# Altium PCB MAIN.PcbDoc (part 1 of 2)
Units mil, origin at the board's own origin, x right, y up, seen from the top; angles counter-clockwise.
Board outline 1220.47 x 826.77 mil, 6 copper layers (Top Layer, Layer 1, Layer 2, Layer 3, Layer 4, Bottom Layer), stack 32.112 mil thick; 100 components, 131 nets, 540 pads, 322 vias.
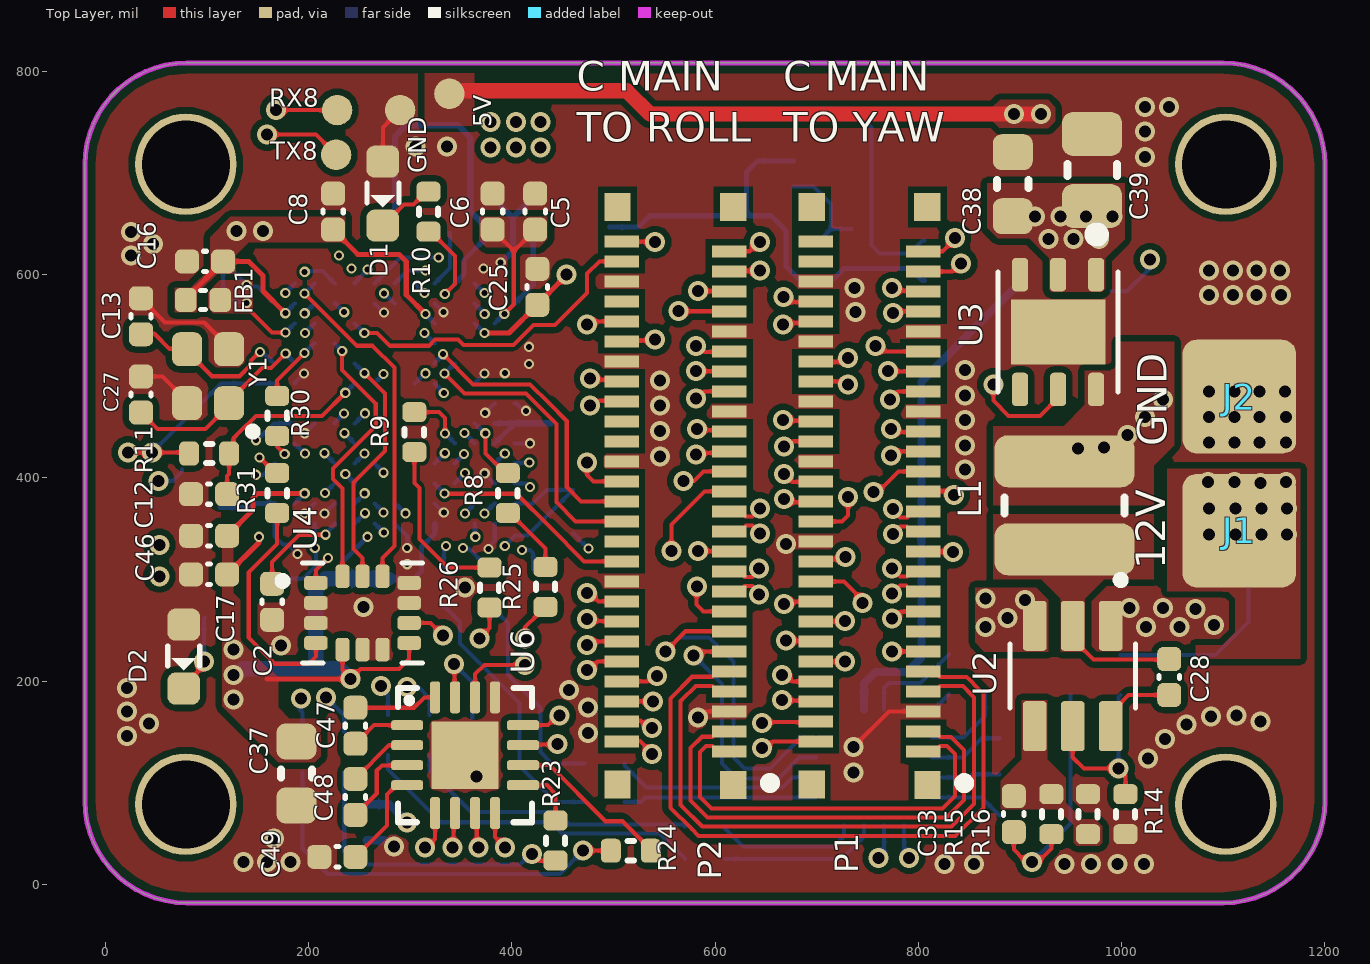
[diagram p0: Top Layer view]
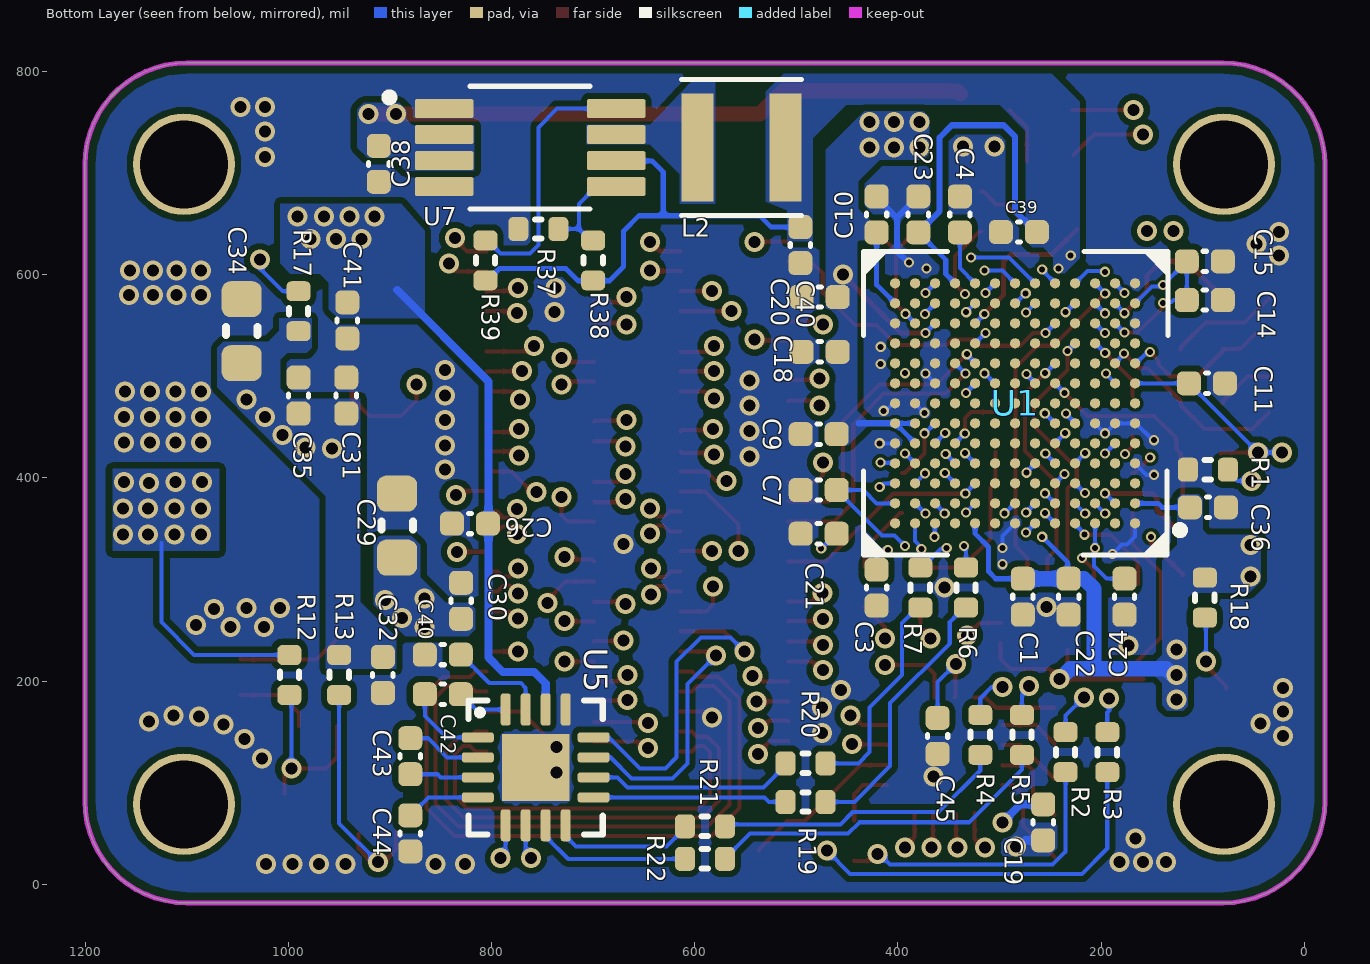
[diagram p1: Bottom Layer view, seen from below]
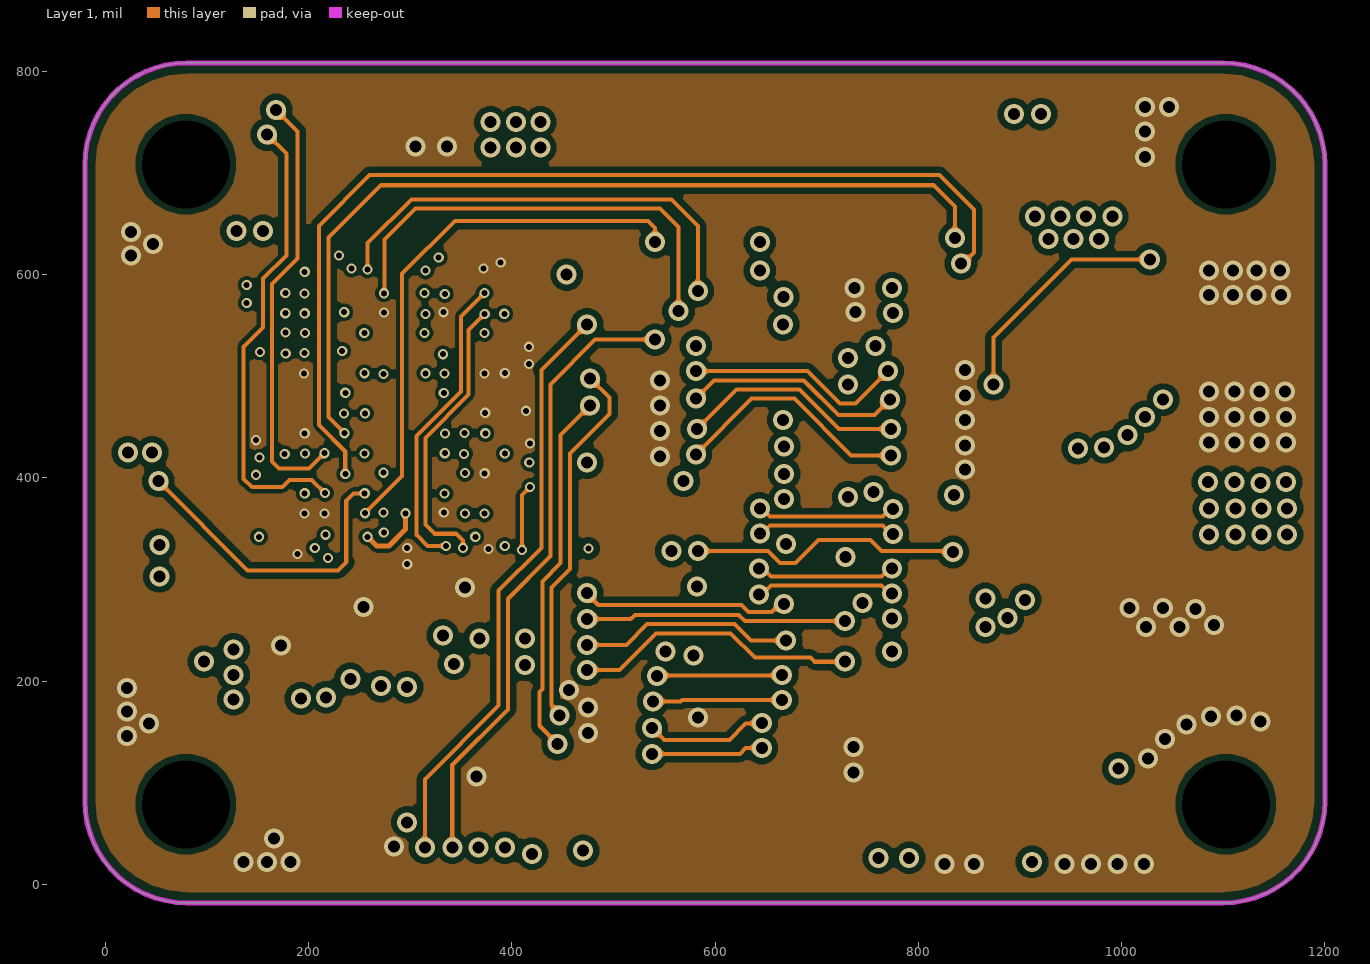
[diagram p2: Layer 1]
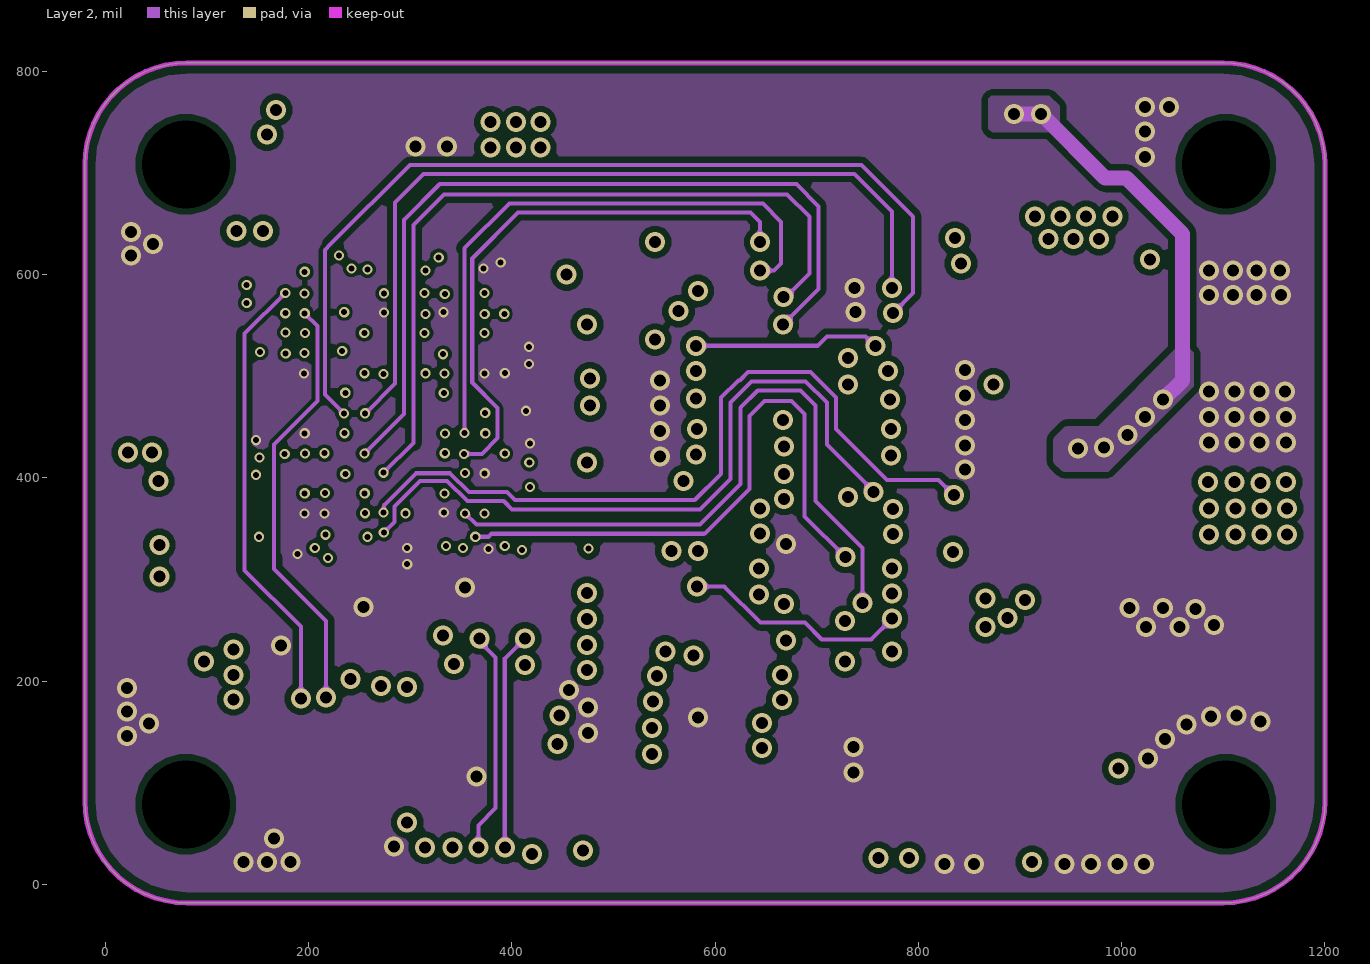
[diagram p3: Layer 2]
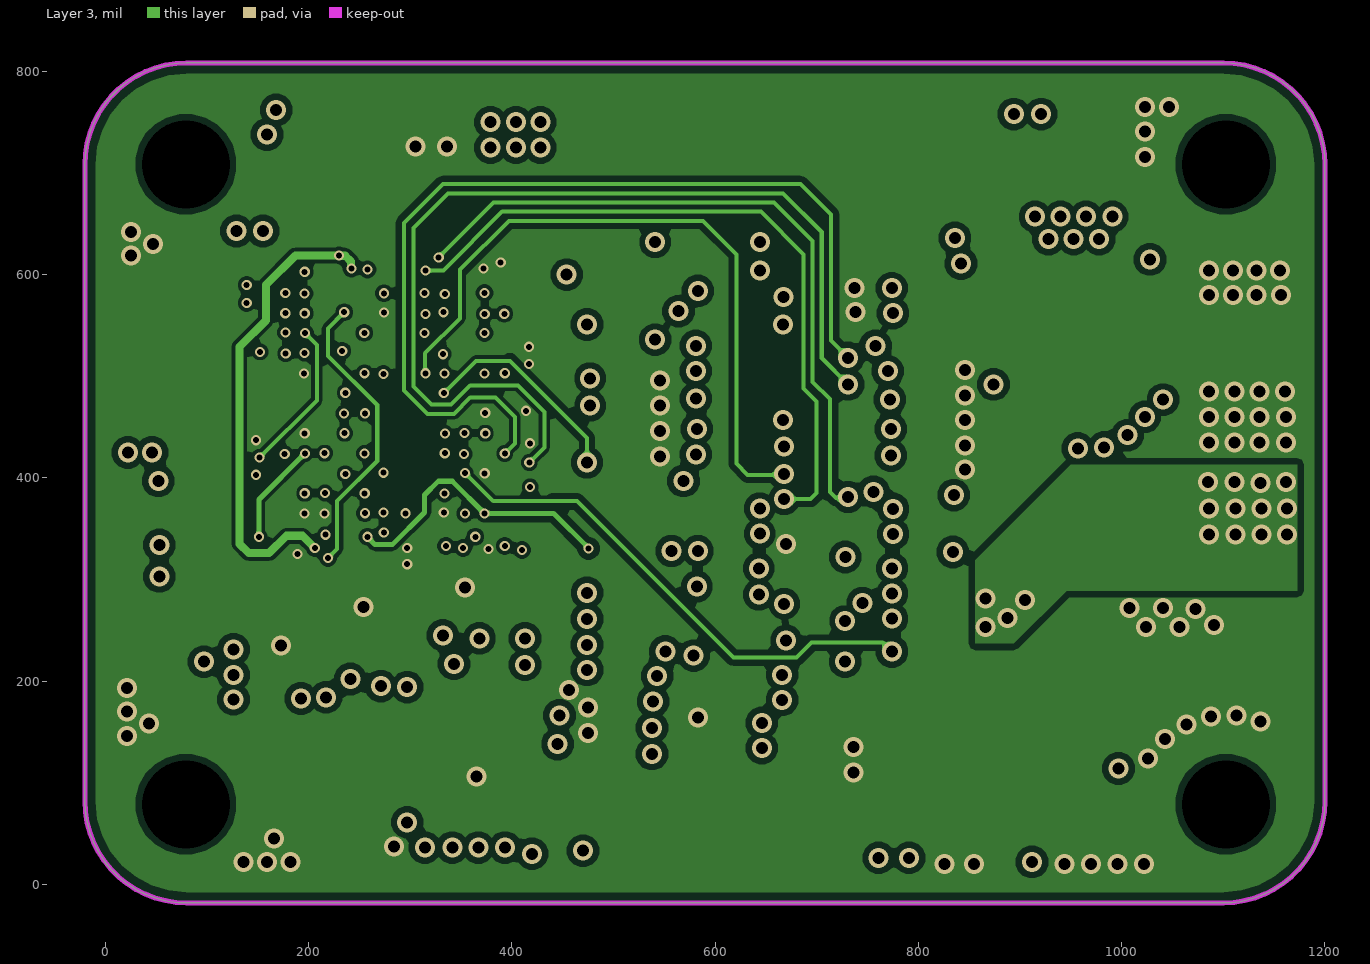
[diagram p4: Layer 3]
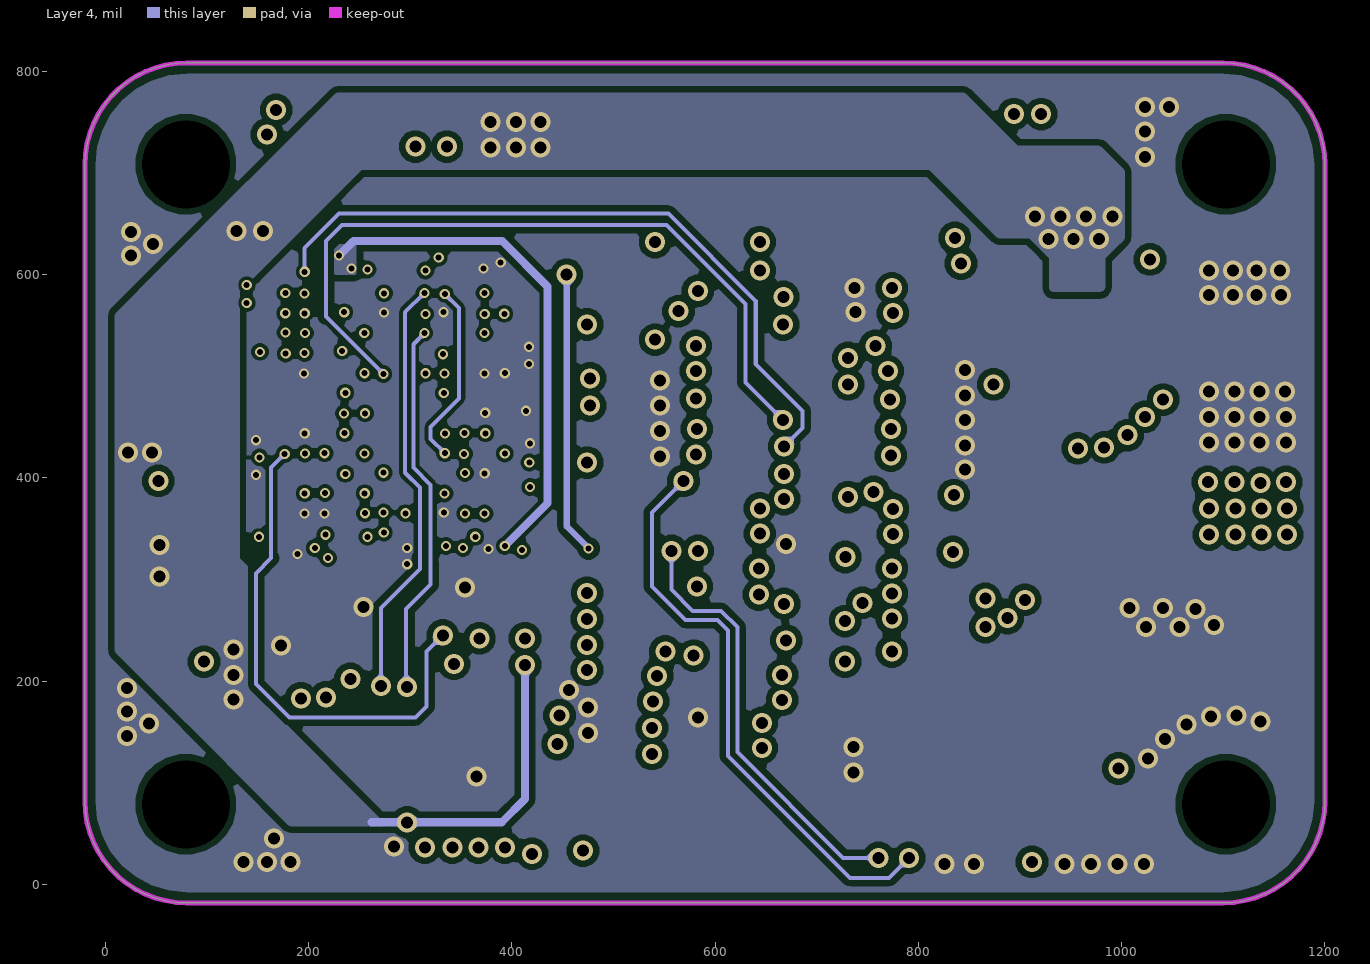
[diagram p5: Layer 4]
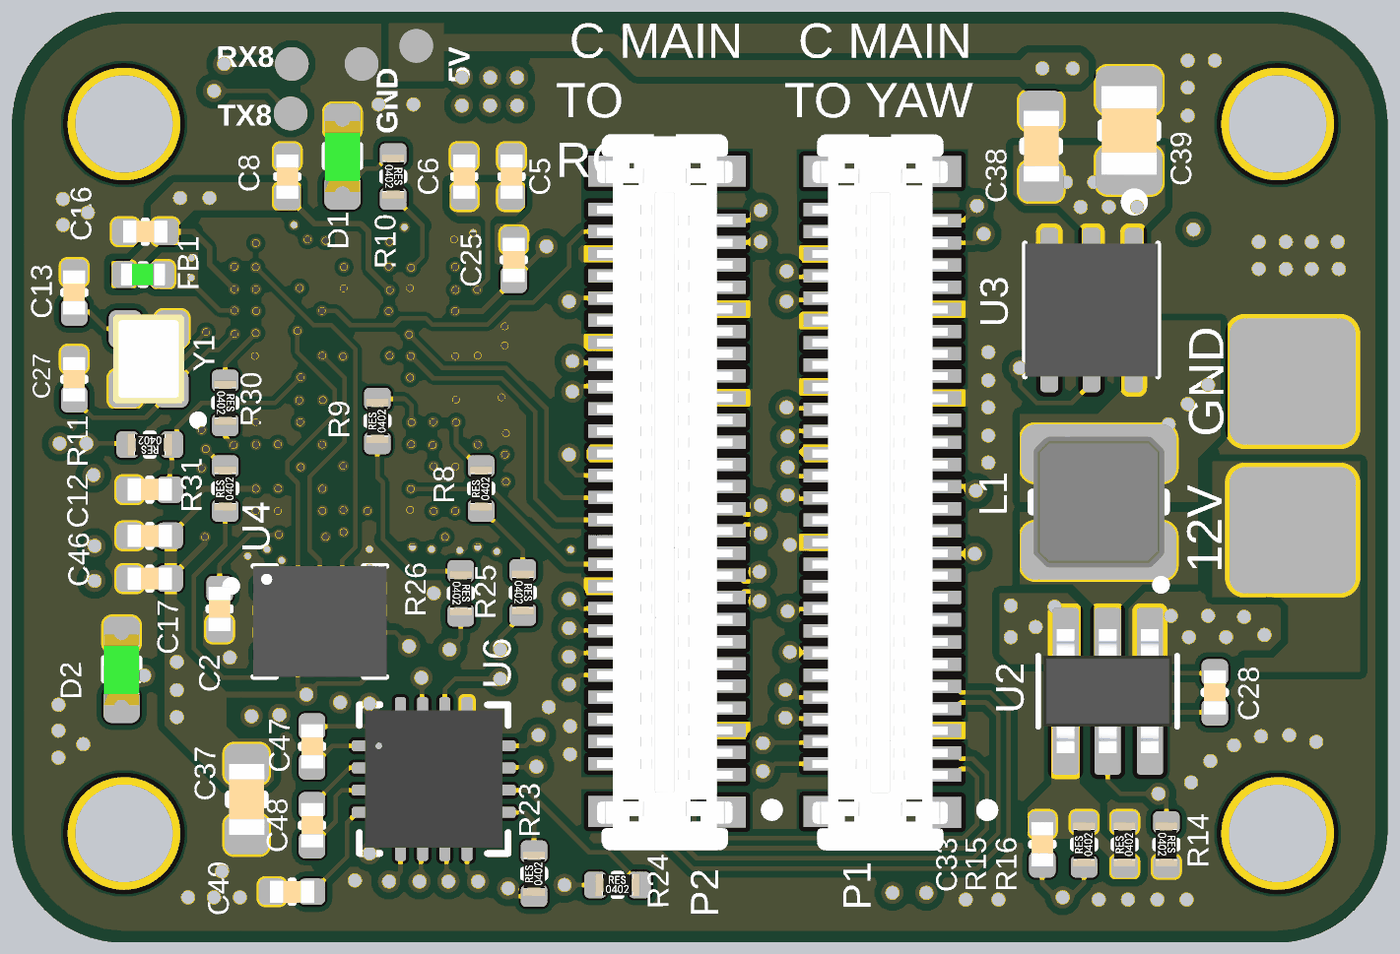
[diagram p7: 3D render of the assembled board from above, using the file's embedded part models]
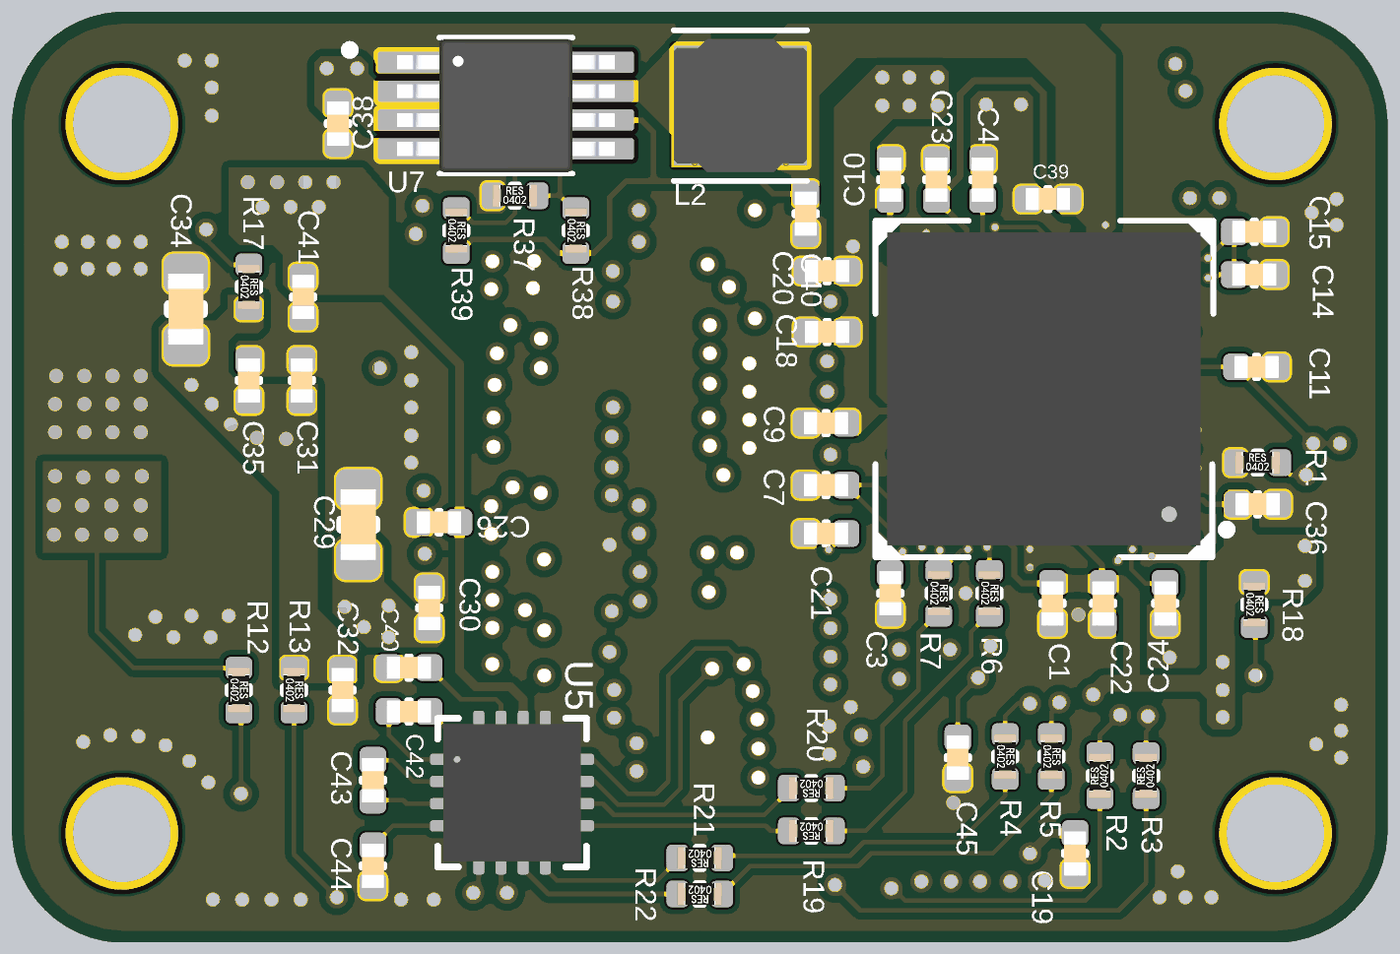
[diagram p8: 3D render of the assembled board from below, using the file's embedded part models]

## Layer stack, top to bottom
Top Solder: solder mask 0.4, Solder Resist, Dk 3.5
Top Layer: signal copper 1.4
Dielectric 1: prepreg 2.8, PP-006, Dk 4.1
Layer 1: signal copper 1.378
Dielectric 2: prepreg 2.8, PP-006, Dk 4.1
Layer 2: signal copper 1.378
Dielectric 3: dielectric 12.6, FR-4, Dk 4.8
Layer 3: signal copper 1.378
Dielectric 4: prepreg 2.8, PP-006, Dk 4.1
Layer 4: signal copper 1.378
Dielectric 5: prepreg 2.8, PP-006, Dk 4.1
Bottom Layer: signal copper 1.4
Bottom Solder: solder mask 0.4, Solder Resist, Dk 3.5

## Board outline
-20.24,81.61 -20.24,708.39 cw(c79.76,708.39) 79.76,808.39 1100.24,808.39 cw(c1100.24,708.39) 1200.24,708.39 1200.24,81.61 cw(c1100.24,81.61) 1100.24,-18.39 79.76,-18.39 cw(c79.76,81.61)

## Design rules (kind name [scope] priority, off if disabled: settings)
BoardOutlineClearance [All] p1: gap=10 ignorepadtopadclearanceinfootprint=FALSE except(0: Arc-SplitContinuation Track-SplitContinuation SMDPad-SplitContinuation THPad-SplitContinuation Via-SplitContinuation Fill-SplitContinuation Poly-SplitContinuation Region-SplitContinuation Text-OutlineEdge Text-CavityEdge Text-CutoutEdge Text-SplitBarrior Text-SplitContinuation)
Clearance [IsKeepOut] p1: gap=8 ignorepadtopadclearanceinfootprint=FALSE
Clearance Clearance_BGA [WithinRoom('Room_BGA')] p2: gap=3.5 ignorepadtopadclearanceinfootprint=FALSE
Clearance Clearance_1 [All] p3: gap=5 ignorepadtopadclearanceinfootprint=FALSE except(6: Arc-Poly Arc-Region Track-Poly Track-Region SMDPad-Poly SMDPad-Region THPad-Poly THPad-Region Via-Poly Fill-Poly Poly-Poly)
DiffPairsRouting [All] p1: maxlimit=10 minlimit=4 mostfreqgap=5 toplayer_minwidth=3 toplayer_maxwidth=15 toplayer_prefwidth=4 midlayer1_minwidth=3 midlayer1_maxwidth=15 midlayer1_prefwidth=4 midlayer2_minwidth=3 midlayer2_maxwidth=15 midlayer2_prefwidth=4 midlayer3_minwidth=3 midlayer3_maxwidth=15 midlayer3_prefwidth=4 midlayer4_minwidth=3 midlayer4_maxwidth=15 midlayer4_prefwidth=4 bottomlayer_minwidth=3 bottomlayer_maxwidth=15 bottomlayer_prefwidth=4 maxuncoupledlength=500
FanoutControl Fanout_BGA [IsBGA] p1: bgadir=Out bgaviamode=Centered fanoutstyle=BGA fanoutdirection=Alternating viagrid=1 // Fanout_BGA (Default Rule)
MinimumSolderMaskSliver [All] p1: minsoldermaskwidth=1
PlaneClearance [All] p1: clearance=4
PlaneConnect [All] p1: planeconnectstyle=Direct reliefexpansion=20 reliefentries=4 reliefconductorwidth=10 reliefairgap=10
PolygonConnect [All] p1: connectstyle=Direct reliefconductorwidth=10 reliefentries=4 polygonreliefangle="90 Angle" airgapwidth=10
RoomDefinition Room_BGA [InComponent('No Component')] p1: confinementstyle=ConfineIn formatcopy=TRUE lockcomponents=FALSE outline 130,630 431,630 440,621 440,325 431.24,316.24 142.76,316.24 130,329
RoutingVias RoutingVias_BGA [All] p1: holewidth=5 width=10 viastyle="Through Hole" minholewidth=5 minwidth=10 maxholewidth=6 maxwidth=10
RoutingVias [WithinRoom('Room_BGA')] p2: holewidth=10 width=20 viastyle="Through Hole" minholewidth=10 minwidth=20 maxholewidth=10 maxwidth=20 viatemplateguid#1={8185B59E-BD36-4B11-A7E7-2E813E071522} viatemplateguid#2={F6840AE0-47C1-4495-A7C7-94DCDD5C9050} viatemplateguid#3={D59ADE04-3A0F-4E29-BE8F-D7E32F5ED3DA} viatemplateguid#4={C1660F34-ED9C-4C3C-824C-38376543577F} viatemplateguid#5={C3E5A682-FDE5-45D0-A0D7-587F5B1B6802} viatemplateguid#6={4CE84C5C-E532-40FD-8986-165E774AEF0F} viatemplateguid#7={8CB7C52E-FFBE-4B24-973B-887828686E6B} viatemplatename#1=v50h30m0mx0(1) viatemplatename#2=v50h30m0mx0 viatemplatename#3=v20h10m0mx0 viatemplatename#4=v20h10m0mx0(2) viatemplatename#5=v50h30m0mx0_2670034071(1) viatemplatename#6=v50h30m0mx0_2670034071(3) viatemplatename#7=v56h30m0mx0
SilkToSilkClearance [All] p1: silktosilkclearance=1
SilkToSolderMaskClearance [IsPad] p1: minsilkscreentomaskgap=0 clearancetoexposedcopper=TRUE
SolderMaskExpansion [All] p1: expansion=4 istentingtop=FALSE soldermaskfromhole=TRUE
UnRoutedNet [InNet('No Net')] p1:
Width Width_BGA [WithinRoom('Room_BGA')] p1: maxlimit=8 minlimit=3.5 preferedwidth=4
Width [All] p2: maxlimit=20 minlimit=4 preferedwidth=8 checkconnectedcopper=TRUE
22 further rules are at their usual default settings.

## Classes and differential pairs
component class RS232: C40 C41 C42 C43 C44 C45 C46 C47 C48 C49 R19 R20 R21 R22 R23 R24 R25 R26 U5 U6
component class PWR: C28 C29 C30 C31 C32 C33 C34 C35 C36 C37 C38 C39 C40 D2 J1 J2 L1 L2 R12 R13 R14 R15 R16 R17 R18 R37 R38 R39 U2 U3 U7
component class MCU: C1 C2 C3 C4 C5 C6 C7 C8 C9 C10 C11 C12 C13 C14 C15 C16 C17 C18 C19 C20 C21 C22 C23 C24 C25 C26 C27 D1 FB1 R1 R2 R3 R4 R5 R6 R7 R8 R9 R10 R11 U1 Y1
component class IMU: C38 C39 R30 R31 U4
component class Connector: P1 P2
differential pair ETHE2_TX: +ETHE2_TX_P -ETHE2_TX_N
differential pair ETHE2_RX: +ETHE2_RX_P -ETHE2_RX_N
differential pair ETHE1_TX: +ETHE1_TX_P -ETHE1_TX_N
differential pair ETHE1_RX: +ETHE1_RX_P -ETHE1_RX_N

## Components (designator, comment, footprint, x,y, rotation, side; value= is the part's Value field where it differs from the comment)
C1 "CAP0402" CAP0402 277,283 r270 bottom value=0.1uF
C2 "CAP0402" CAP0402 164,278 r270 top value=2.2uF
C3 "CAP0402" CAP0402 421,292 r270 bottom value=2.2uF
C4 "CAP0402" CAP0402 339,659.28 r90 bottom value=2.2uF
C5 "CAP0402" CAP0402 423,662 r90 top value=2.2uF
C6 "CAP0402" CAP0402 381,662 r90 top value=0.1uF
C7 "CAP0402" CAP0402 478,388 r0 bottom value=4.7uF
C8 "CAP0402" CAP0402 224,662 r90 top value=1uF
C9 "CAP0402" CAP0402 478,443 r0 bottom value=0.1uF
C10 "CAP0402" CAP0402 421,659.28 r90 bottom value=0.1uF
C11 "CAP0402" CAP0402 96,493 r180 bottom value=1uF
C12 "CAP0402 0.1uF 50V" CAP0402 102,384 r180 top value=0.1uF
C13 "CAP0402 12pF 50V" CAP0402 35,559 r270 top value=12pF
C14 "CAP0402" CAP0402 98,575 r180 bottom value=1uF
C15 "CAP0402" CAP0402 98,613 r180 bottom value=0.1uF
C16 "CAP0402 0.1uF 50V" CAP0402 98,613 r180 top value=0.1uF
C17 "CAP0402 0.1uF 50V" CAP0402 102,305 r180 top value=0.1uF
C18 "CAP0402 0.1uF 50V" CAP0402 477,524 r0 bottom value=0.1uF
C19 "CAP0402 0.1uF 50V" CAP0402 257,61 r270 bottom value=0.1uF
C20 "CAP0402 0.1uF 50V" CAP0402 477,578 r0 bottom value=0.1uF
C21 "CAP0402 0.1uF 50V" CAP0402 478,345 r0 bottom value=0.1uF
C22 "CAP0402 0.1uF 50V" CAP0402 232,283 r270 bottom value=0.1uF
C23 "CAP0402 0.1uF 50V" CAP0402 380,659.28 r90 bottom value=0.1uF
C24 "CAP0402 0.1uF 50V" CAP0402 177,283 r270 bottom value=0.1uF
C25 "CAP0402 0.1uF 50V" CAP0402 425,588 r90 top value=0.1uF
C26 "CAP0402 0.1uF 50V" CAP0402 821.28,355 r0 bottom value=0.1uF
C27 "CAP0402 12pF 50V" CAP0402 35,482 r270 top value=12pF
C28 "CC0402KRX5R9BB104" CAP0402 1047,204 r270 top
C29 "GRM188R6YA106MA73D" CAP0603 893,353 r90 bottom
C30 "CC0402KRX5R9BB104" CAP0402 830,279 r270 bottom
C31 "GRM158R61A226ME15D" CAP0402 943,481 r270 bottom
C32 "GRM158R61A226ME15D" CAP0402 907,206 r90 bottom
C33 "75pF" CAP0402 894,69 r90 top
C34 "GRM188R6YA106MA73D" CAP0603 1046,544.31 r90 bottom
C35 "CC0402KRX5R9BB104" CAP0402 990,481 r270 bottom
C36 "CC0402KRX5R9BB104" CAP0402 95,371 r0 bottom
C37 "GRM188R6YA106MA73D" CAP0603 188,109 r270 top
C38 "CAP0402 10uF 10V" CAP0402 911,709 r270 bottom value=10uF
C38 "C0603C104M5RACTU" CAP0603 893,689 r90 top
C39 "CAP0402 22uF 10V" CAP0402 281,642 r0 bottom value=22uF
C39 "CL21A476MQYNNNE" CAP0805 971,703 r90 top
C40 "CAP0402 22uF 10V" CAP0402 496,629 r270 bottom value=22uF
C40 "GRM155R71H104KE14D" CAP0402 848,226 r180 bottom
C41 "CC0402KRX5R8BB105" CAP0402 942,555 r90 bottom
C42 "GRM155R71H104KE14D" CAP0402 848,187 r180 bottom
C43 "GRM155R71H104KE14D" CAP0402 880,126 r90 bottom
C44 "GRM155R71H104KE14D" CAP0402 880,50 r90 bottom
C45 "GRM155R71H104KE14D" CAP0402 361,146 r90 bottom
C46 "CC0402KRX5R8BB105" CAP0402 102,343 r0 top
C47 "GRM155R71H104KE14D" CAP0402 246,156 r90 top
C48 "GRM155R71H104KE14D" CAP0402 246,86 r90 top
C49 "GRM155R71H104KE14D" CAP0402 228.28,27 r0 top
D1 "SML-310MTT86" "LED0603 GREEN" 273,679.71 r90 top
D2 "SML-310MTT86" "LED0603 GREEN" 77,224 r90 top
FB1 "BLM15PX121SZ1D" FERRIT0402 96,575 r180 top
J1 "CON1" "ESC PAD 3X4" 1116,348 r0 top
J2 "CON1" "ESC PAD 3X4" 1116,480 r0 top
L1 "SRN3012BTA-100M" SRN3012BTA-100M 944,373 r90 top
L2 "NR3015T2R2M" IND_NR3015T2R2M 554,725 r180 bottom
P1 "XSLS00-52-B" XSXL52 756.09,381.85 r90 top
P2 "XSLS00-52-B" XSXL52 565,382 r90 top
R1 "RES0402 4K7" RES0402 95,408 r180 bottom value=4K7
R2 "RES0402 0R" RES0402 235,130 r90 bottom value=0R
R3 "RES0402 0R" RES0402 194,130 r90 bottom value=0R
R4 "RES0402 0R" RES0402 319,147 r270 bottom value=0R
R5 "RES0402 0R" RES0402 278,147 r270 bottom value=0R
R6 "RES0402 0R" RES0402 333,292 r270 bottom value=0R
R7 "RES0402 0R" RES0402 378,292 r270 bottom value=0R
R8 "RES0402 0R" RES0402 396,385 r90 top value=0R
R9 "RES0402 0R" RES0402 304,445 r90 top value=0R
R10 "RES0402 0R" RES0402 318,662 r270 top value=1K
R11 "RES0402 4K7" RES0402 102,424 r180 top value=4K7
R12 "511K" RES0402 999,206 r270 bottom
R13 "49.9R" RES0402 950,206 r270 bottom
R14 "105K" RES0402 1004,69 r270 top
R15 "100K" RES0402 931,69 r90 top
R16 "13.3K" RES0402 967,69 r90 top
R17 "RES0402 10K" RES0402 990,564 r270 bottom value=10K
R18 "RES0402" RES0402 98,282 r270 bottom value=510
R19 "RES0402" RES0402 491,81 r0 bottom value=0R
R20 "RES0402" RES0402 491,119 r0 bottom value=0R
R21 "RES0402" RES0402 590,57 r0 bottom value=0R
R22 "RES0402" RES0402 590,25 r0 bottom value=0R
R23 "RES0402" RES0402 443,43 r90 top value=0R
R24 "RES0402" RES0402 517,33 r0 top value=0R
R25 "RES0402" RES0402 433,292.68 r270 top value=0R
R26 "RES0402" RES0402 378,292 r270 top value=0R
R30 "RES0402" RES0402 169,461 r270 top value=4.7K
R31 "RES0402" RES0402 169,385 r90 top value=4.7K
R37 "RES0402 100K" RES0402 806,614 r270 bottom value=100K
R38 "RES0402 13K3" RES0402 700,614 r270 bottom value=13K3
R39 "RES0402 10K" RES0402 754,645 r180 bottom value=10K
U1 "STM32H747AII6" UFBGA169 284.68,473.37 r0 bottom
U2 "TPS54302DDCR" "SOT95P280X110-6N - duplicate1" 952,205 r270 top
U3 "LD39200PUR" LD39200PUR 937.6,543.5 r270 top
U4 "ICM-42688-P" ICM-42688-P 253,267 r0 top
U5 "TRSF3232EIRGTR" VQFN_2EIRGTR_TEX#1 756.54,115 r180 bottom
U6 "TRSF3232EIRGTR" VQFN_2EIRGTR_TEX#2 354,127 r0 top
U7 "TPS62160DGKT" SOP65P490X110-8N 762,725 r180 bottom
Y1 "ECS-240-12-37B-CKY-TR" XTAL_ECS-240-12-37B-CKY-TR 101,500 r90 top

## Footprints (in the part's own frame and the unit in brackets; to place one, negate y for a bottom-side part, rotate by r counter-clockwise, add the part's x,y. Pads: shape width x height; smd on the part's side, far side on the other; paste and mask are expansions set on the pad)
CAP0402 [mm]
  rrect50% 0.6x0.6 smd mask+0.05: 1(0.45,0) 2(-0.45,0)
  silkscreen extent -0.04,-0.25 0.04,0.25, body extent -0.5,-0.25 0.5,0.25, height 0.55
CAP0603 [mm]
  rrect50% 0.9x1 smd mask+0.05: 1(-0.8,0) 2(0.8,0)
  silkscreen extent -0.1,-0.39 0.1,0.39, body extent -0.8,-0.4 0.8,0.4, height 0.8
CAP0805 [mm]
  rrect50% 1.1x1.5 smd mask+0.05: 1(-0.9,0) 2(0.9,0)
  silkscreen extent -0.15,-0.62 0.15,0.61, body extent -1,-0.62 1,0.63, height 0.9
"ESC PAD 3X4" [mil]
  rrect25% 112x112 smd: 1(0,0)
FERRIT0402 [mm]
  rrect50% 0.54x0.6 smd mask+0.05: 1(-0.432,0) 2(0.432,0)
  silkscreen extent -0.06,-0.24 0.06,0.24, body extent -0.5,-0.25 0.5,0.25, height 0.5
ICM-42688-P [mm]
  rrect50% 0.59x0.35 smd mask+0.04: 1(-1.165,0.75) 2(-1.165,0.25) 3(-1.165,-0.25) 4(-1.165,-0.75) 8(1.165,-0.75) 9(1.165,-0.25) 10(1.165,0.25) 11(1.165,0.75)
  rrect50% 0.35x0.59 smd mask+0.04: 5(-0.5,-0.915) 6(0,-0.915) 7(0.5,-0.915) 12(0.5,0.915) 13(0,0.915) 14(-0.5,0.915)
  silkscreen extent -2.1,-1.25 1.5,1.25, body extent -1.5,-1.25 1.5,1.25, height 0.97
IND_NR3015T2R2M [mm]
  rect 0.8x2.7 smd: 1(-1.1,0) 2(1.1,0)
  silkscreen extent -1.5,-1.7 1.5,1.7, body extent -1.5,-1.5 1.5,1.5, height 1.5
LD39200PUR [mm]
  rrect50% 0.84x0.4 smd: 1(-1.435,0.95) 2(-1.435,0) 3(-1.435,-0.95) 4(1.435,-0.95) 5(1.435,0) 6(1.435,0.95)
  rect 1.625x2.365 smd paste-2: 7(0,0)
  silkscreen extent -2.59,-1.5 1.5,1.5, body extent -1.5,-1.5 1.5,1.5, height 1
"LED0603 GREEN" [mm]
  rrect50% 0.8x0.82 smd mask+0.05: 1(0.8,0) 2(-0.8,0)
  silkscreen extent -0.34,-0.4 0.26,0.4, body extent -0.8,-0.4 0.8,0.4, height 0.7
RES0402 [mm]
  rrect50% 0.5x0.6 smd mask+0.05: 1(-0.5,0) 2(0.5,0)
  silkscreen extent -0.08,-0.24 0.08,0.24, body extent -0.5,-0.25 0.5,0.25, height 0.35
SOP65P490X110-8N [mm]
  rrect25% 1.47x0.48 smd paste+0 mask+0.102: 1(-2.15,0.975) 2(-2.15,0.325) 3(-2.15,-0.325) 4(-2.15,-0.975) 5(2.15,-0.975) 6(2.15,-0.325) 7(2.15,0.325) 8(2.15,0.975)
  silkscreen extent -3.62,-1.54 1.5,1.54, body extent -2.45,-1.5 2.45,1.5, height 1.1
"SOT95P280X110-6N - duplicate1" [mm]
  rrect25% 1.25x0.59 smd: 1(-1.255,0.95) 2(-1.255,0) 3(-1.255,-0.95) 4(1.255,-0.95) 5(1.255,0) 6(1.255,0.95)
  silkscreen extent -2.5,-1.57 0.8,1.57, body extent -1.4,-1.45 1.4,1.45, height 1.1
SRN3012BTA-100M [mm]
  rrect50% 1.3x3.5 smd mask+0.051: 1(-1.1,0) 2(1.1,0)
  silkscreen extent -0.2,-1.5 0.2,1.5, body extent -1.48,-1.48 1.48,1.47, height 1.11
UFBGA169 [mil]
  round 10 smd paste+0 mask+0: A1(-118.11,118.11) A2(-98.43,118.11) A3(-78.74,118.11) A4(-59.06,118.11) A5(-39.37,118.11) A6(-19.68,118.11) A7(0,118.11) A8(19.68,118.11) A9(39.37,118.11) A10(59.06,118.11) A11(78.74,118.11) A12(98.43,118.11) A13(118.11,118.11) B1(-118.11,98.43) B2(-98.43,98.43) B3(-78.74,98.43) B4(-59.06,98.43) B5(-39.37,98.43) B6(-19.68,98.43) B7(0,98.43) B8(19.68,98.43) B9(39.37,98.43) B10(59.06,98.43) B11(78.74,98.43) B12(98.43,98.43) B13(118.11,98.43) C1(-118.11,78.74) C2(-98.43,78.74) C3(-78.74,78.74) C4(-59.06,78.74) C5(-39.37,78.74) C6(-19.68,78.74) C7(0,78.74) C8(19.68,78.74) C9(39.37,78.74) C10(59.06,78.74) C11(78.74,78.74) C12(98.43,78.74) C13(118.11,78.74) D1(-118.11,59.06) D2(-98.43,59.06) D3(-78.74,59.06) D4(-59.06,59.06) D5(-39.37,59.06) D6(-19.68,59.06) D7(0,59.06) D8(19.68,59.06) D9(39.37,59.06) D10(59.06,59.06) D11(78.74,59.06) D12(98.43,59.06) D13(118.11,59.06) E1(-118.11,39.37) E2(-98.43,39.37) E3(-78.74,39.37) E4(-59.06,39.37) E5(-39.37,39.37) E6(-19.68,39.37) E7(0,39.37) E8(19.68,39.37) E9(39.37,39.37) E10(59.06,39.37) E11(78.74,39.37) E12(98.43,39.37) E13(118.11,39.37) F1(-118.11,19.69) F2(-98.43,19.69) F3(-78.74,19.69) F4(-59.06,19.69) F5(-39.37,19.69) F6(-19.68,19.69) F7(0,19.69) F8(19.68,19.69) F9(39.37,19.69) F10(59.06,19.69) F11(78.74,19.69) F12(98.43,19.69) F13(118.11,19.69) G1(-118.11,0) G2(-98.43,0) G3(-78.74,0) G4(-59.06,0) G5(-39.37,0) G6(-19.68,0) G7(0,0) G8(19.68,0) G9(39.37,0) G10(59.06,0) G11(78.74,0) G12(98.43,0) G13(118.11,0) H1(-118.11,-19.68) H2(-98.43,-19.68) H3(-78.74,-19.68) H4(-59.06,-19.68) H5(-39.37,-19.68) H6(-19.68,-19.68) H7(0,-19.68) H8(19.68,-19.68) H9(39.37,-19.68) H10(59.06,-19.68) H11(78.74,-19.68) H12(98.43,-19.68) H13(118.11,-19.68) J1(-118.11,-39.37) J2(-98.43,-39.37) J3(-78.74,-39.37) J4(-59.06,-39.37) J5(-39.37,-39.37) J6(-19.68,-39.37) J7(0,-39.37) J8(19.68,-39.37) J9(39.37,-39.37) J10(59.06,-39.37) J11(78.74,-39.37) J12(98.43,-39.37) J13(118.11,-39.37) K1(-118.11,-59.06) K2(-98.43,-59.06) K3(-78.74,-59.06) K4(-59.06,-59.06) K5(-39.37,-59.06) K6(-19.68,-59.06) K7(0,-59.06) K8(19.68,-59.06) K9(39.37,-59.06) K10(59.06,-59.06) K11(78.74,-59.06) K12(98.43,-59.06) K13(118.11,-59.06) L1(-118.11,-78.74) L2(-98.43,-78.74) L3(-78.74,-78.74) L4(-59.06,-78.74) L5(-39.37,-78.74) L6(-19.68,-78.74) L7(0,-78.74) L8(19.68,-78.74) L9(39.37,-78.74) L10(59.06,-78.74) L11(78.74,-78.74) L12(98.43,-78.74) L13(118.11,-78.74) M1(-118.11,-98.43) M2(-98.43,-98.43) M3(-78.74,-98.43) M4(-59.06,-98.43) M5(-39.37,-98.43) M6(-19.68,-98.43) M7(0,-98.43) M8(19.68,-98.43) M9(39.37,-98.43) M10(59.06,-98.43) M11(78.74,-98.43) M12(98.43,-98.43) M13(118.11,-98.43) N1(-118.11,-118.11) N2(-98.43,-118.11) N3(-78.74,-118.11) N4(-59.06,-118.11) N5(-39.37,-118.11) N6(-19.68,-118.11) N7(0,-118.11) N8(19.68,-118.11) N9(39.37,-118.11) N10(59.06,-118.11) N11(78.74,-118.11) N12(98.43,-118.11) N13(118.11,-118.11)
  silkscreen extent -166,-149 149,149, body extent -139,-139 139,139, height 24
VQFN_2EIRGTR_TEX#1 [mm]
  rrect50% 0.8x0.25 smd paste+0 mask+0: 1(-1.448,0.75) 2(-1.448,0.25) 3(-1.448,-0.25) 4(-1.448,-0.75) 9(1.448,-0.75) 10(1.448,-0.25) 11(1.448,0.25) 12(1.448,0.75)
  rrect50% 0.25x0.8 smd paste+0 mask+0: 5(-0.75,-1.448) 6(-0.25,-1.448) 7(0.25,-1.448) 8(0.75,-1.448) 13(0.75,1.448) 14(0.25,1.448) 15(-0.25,1.448) 16(-0.75,1.448)
  rect 1.68x1.68 smd paste+0 mask+0: 17(0,0)
  silkscreen extent -1.68,-1.68 1.68,1.68, body extent -1.55,-1.55 1.55,1.55, height 0.99
VQFN_2EIRGTR_TEX#2 [mm]
  rrect50% 0.8x0.25 smd paste+0 mask+0.07: 1(-1.448,0.75) 2(-1.448,0.25) 3(-1.448,-0.25) 4(-1.448,-0.75) 9(1.448,-0.75) 10(1.448,-0.25) 11(1.448,0.25) 12(1.448,0.75)
  rrect50% 0.25x0.8 smd paste+0 mask+0.07: 5(-0.75,-1.448) 6(-0.25,-1.448) 7(0.25,-1.448) 8(0.75,-1.448) 13(0.75,1.448) 14(0.25,1.448) 15(-0.25,1.448) 16(-0.75,1.448)
  rect 1.68x1.68 smd paste+0 mask+0: 17(0,0)
  silkscreen extent -1.68,-1.68 1.68,1.68, body extent -1.55,-1.55 1.55,1.55, height 0.99
XSXL52 [mm]
  rect 0.7x0.66 smd: 0(-7.222,-1.346) 0(-7.205,1.549) 0(7.234,-1.344) 0(7.234,1.549)
  rect 0.3x0.86 smd: 1(-6.38,-1.242) 2(-6.13,1.448) 3(-5.88,-1.242) 4(-5.63,1.448) 5(-5.38,-1.242) 6(-5.13,1.448) 7(-4.88,-1.242) 8(-4.63,1.448) 9(-4.38,-1.242) 10(-4.13,1.448) 11(-3.88,-1.242) 12(-3.63,1.448) 13(-3.38,-1.242) 14(-3.13,1.448) 15(-2.88,-1.242) 16(-2.63,1.448) 17(-2.38,-1.242) 18(-2.13,1.448) 19(-1.88,-1.242) 20(-1.63,1.448) 21(-1.38,-1.242) 22(-1.13,1.448) 23(-0.88,-1.242) 24(-0.63,1.448) 25(-0.38,-1.242) 26(-0.13,1.448) 27(0.12,-1.242) 28(0.37,1.448) 29(0.62,-1.242) 30(0.87,1.448) 31(1.12,-1.242) 32(1.37,1.448) 33(1.62,-1.242) 34(1.87,1.448) 35(2.12,-1.242) 36(2.37,1.448) 37(2.62,-1.242) 38(2.87,1.448) 39(3.12,-1.242) 40(3.37,1.448) 41(3.621,-1.242) 42(3.871,1.448) 43(4.121,-1.242) 44(4.371,1.448) 45(4.621,-1.242) 46(4.871,1.448) 47(5.121,-1.242) 48(5.371,1.448) 49(5.621,-1.242) 50(5.871,1.448) 51(6.121,-1.242) 52(6.371,1.448)
  silkscreen extent -7.3,-2.39 -7.05,-2.14, body extent -8.08,-1.37 8.07,1.68, height 0.85
XTAL_ECS-240-12-37B-CKY-TR [mm]
  rrect50% 0.85x0.75 smd mask+0.051: 1(-0.675,-0.525) 2(0.675,-0.525) 3(0.675,0.525) 4(-0.675,0.525)
  silkscreen extent -1.45,-1.19 -1.31,-1.04, body extent -1,-0.8 1,0.8, height 0.5

## Part data
C1 C2 C3 C4 C5 C6 C7 C8 C9 C10 C11 C14 C15: "Cap 0402", MP="add later"
C12 C16 C17 C18 C19 C20 C21 C22 C23 C24 C25 C26: "Cap 0.1uF 50V 0402", Package=0402, Voltage=50V, MP=CC0402KRX5R9BB104
C13 C27: "Cap 12pF 50V 0402"
C28 C30 C35 C36: library part CMP-00265-1, "CAP CER 0.1UF 50V X5R 0402", Capacitance=100nF, Case/Package=0402, Dielectric=X5R, Manufacturer=Yageo, Max Operating Temperature=85°C, Min Operating Temperature=-55°C, Tolerance=10%, Voltage Rating=50V, Halogen Free="Halogen Free", Lead Free="Lead Free", Length=0.039inch, Manufacturer 1=Yageo, Manufacturer Part Number=CC0402KRX5R9BB104, Manufacturer Part Number 1=CC0402KRX5R9BB104, Mount="Surface Mount", Packaging="Tape and Reel", Thickness=0.022inch, Voltage Rating (DC)=50V, Width=0.02inch
C29 C34 C37: library part CMP-01031-1, "CAP CER 10UF 35V X5R 0603", Capacitance=10uF, Case Code (Imperial)=0603, Case Code (Metric)=1608, Dielectric=X5R, Manufacturer 1="Murata Electronics", Max Operating Temperature=85°C, Min Operating Temperature=-55°C, Package Quantity=1, Tolerance=20%, Voltage=35V, Case/Package=0603, Composition=Ceramic, Depth=0.8mm, Height=0.8mm, Lead Free="Lead Free", Length=1.6mm, Manufacturer Part Number 1=GRM188R6YA106MA73D, Mount="Surface Mount", Number of Pins=2, Packaging="Tape and Reel", REACH SVHC="No SVHC", Termination=SMD/SMT, Thickness=0.031inch, Voltage Rating=35V, Voltage Rating (DC)=35V, Weight=0.000222oz, Width=0.031inch
C31 C32: library part CMP-00520-1, "CAP CER 22UF 10V X5R 0402", Capacitance=22uF, Case Code (Imperial)=0402, Case Code (Metric)=1005, Dielectric=X5R, Manufacturer 1="TDK Corporation", Max Operating Temperature=85°C, Min Operating Temperature=-55°C, Tolerance=10%, Voltage=10V, Case/Package=0402, Depth=0.5mm, Length=1mm, Manufacturer Part Number 1=GRM158R61A226ME15D, Packaging="Tape and Reel", Radiation Hardening=No, REACH SVHC="No SVHC", Termination=SMD/SMT, Voltage Rating=10V
C33: library part CAP_Dup1_16, "CAP CER 75PF 25V C0G/NP0 0402", Dielectric Type=Capacitors, Manufacturer=YAGEO, Manufacturer PN=CC0402JRNPO9BN750, Package Size="0402 (1005 Metric)", Rated Voltage=25V, Temperature Coefficient="C0G, NP0", Tolerance=5%, CLASS=DISCRETE, PART_NUMBER=TMP-416
C38: "Cap 10uF 10V 0402", Package=0402, Voltage=10V, MP=GRT155R61A106ME13D
C38: library part CMP-00691-1, "CAP CER 0.1UF 50V X7R 0603", Capacitance=100nF, Case Code (Imperial)=0603, Case Code (Metric)=1608, Dielectric=X7R, Dielectric Material=Ceramic, Manufacturer 1=KEMET, Max Operating Temperature=125°C, Min Operating Temperature=-55°C, Package Quantity=1, Tolerance=20%, Voltage Rating=50V, Case/Package=0603, Contact Plating=Tin,Matte, Depth=0.8mm, Dissipation Factor=2.5%, Height=0.8mm, Lead Pitch=0.7mm, Length=1.6mm, Manufacturer Part Number 1=C0603C104M5RACTU, Mount="Surface Mount,PCB", Packaging="Tape and Reel", Radiation Hardening=No, REACH SVHC="No SVHC", Termination=SMD/SMT, Thickness=0.034inch, Voltage Rating (DC)=50V, Width=0.031inch
C39 C40: "Cap 22uF 10V 0402", Package=0402, Voltage=10V, MP=GRM158R61A226ME15D
C39: library part 885012107014, "CAP CER 47UF 6.3V X5R 0805", Capacitance=47uF, Case Code (Imperial)=0805, Case Code (Metric)=2012, Dielectric=X5R, Max Operating Temperature=85°C, Min Operating Temperature=-55°C, Tolerance=20%, Voltage Rating=6.3V, Case/Package=0805, Category="Ceramic Capacitors", ComponentLink1Description=http://www.farnell.com/datasheets/1958454.pdf?src-supplier=Farnell, ComponentLink1URL=http://www.farnell.com/datasheets/1958454.pdf?src-supplier=Farnell, ComponentLink2Description=http://www.farnell.com/datasheets/1958454.pdf?src-supplier=Element14, ComponentLink2URL=http://www.farnell.com/datasheets/1958454.pdf?src-supplier=Element14, ComponentLink3Description=https://katalog.we-online.de/pbs/datasheet/885012107014.pdf?src-supplier=Digi-Key, ComponentLink3URL=https://katalog.we-online.de/pbs/datasheet/885012107014.pdf?src-supplier=Digi-Key, ComponentLink4Description=http://www.farnell.com/datasheets/1958454.pdf?src-supplier=Newark, ComponentLink4URL=http://www.farnell.com/datasheets/1958454.pdf?src-supplier=Newark, Length=0.079inch, Manufacturer Part Number=CL21A476MQYNNNE, Mount="Surface Mount", Packaging="Cut Tape", Pricing 1="1=0.37000, 5=0.35200, 10=0.33000, 25=0.31900, 50=0.30900, 100=0.29800 (USD)", RoHS=Yes, RoHS Compliant=Yes, Series=WCAP-CSGP, Stock 1=3580, Supplier 1=Newark, Thickness=0.057inch, Voltage Rating (DC)=6.3V, Width=0.049inch
C40 C42 C43 C44 C45 C47 C48 C49: library part CMP-01036-1, "CAP CER 0.1UF 50V X7R 0402", Capacitance=100nF, Case Code (Imperial)=0402, Case Code (Metric)=1005, Dielectric=X7R, Dielectric Material=Ceramic, Manufacturer 1="Murata Electronics", Max Operating Temperature=125°C, Min Operating Temperature=-55°C, Package Quantity=10000, Tolerance=10%, Voltage=50V, Case/Package=0402, Composition=Ceramic, Depth=0.5mm, Dissipation Factor=0.025%, Height=0.5mm, Lead Free="Lead Free", Length=1mm, Manufacturer Part Number 1=GRM155R71H104KE14D, Material=Ceramic, Mount="Surface Mount", Packaging="Tape and Reel", REACH SVHC="No SVHC", Termination=SMD/SMT, Thickness=0.022inch, Voltage Rating=50V, Voltage Rating (DC)=50V, Weight=0.000212oz, Width=0.5mm
C41 C46: library part CMP-00520-1, "CAP CER 1UF 25V X5R 0402", Capacitance=1uF, Case Code (Imperial)=0402, Case Code (Metric)=1005, Dielectric=X5R, Manufacturer 1="TDK Corporation", Max Operating Temperature=85°C, Min Operating Temperature=-55°C, Tolerance=10%, Voltage=25V, Case/Package=0402, Depth=0.5mm, Length=1mm, Manufacturer Part Number 1=CC0402KRX5R8BB105, Packaging="Tape and Reel", Radiation Hardening=No, REACH SVHC="No SVHC", Termination=SMD/SMT, Voltage Rating=25V
D1 D2: library part CMP-01130-2, "LED GREEN CLEAR 0603 SMD", Case Code (Imperial)=0603, Case Code (Metric)=1608, Color=Green,Yellow, Forward Current=20mA, Forward Voltage=2.2V, Illumination Color=Green, Lens Color=Colorless,Clear, Manufacturer 1="Rohm Semiconductor", Max Operating Temperature=85°C, Min Operating Temperature=-30°C, Package Quantity=3000, Case/Package=0603, Dominant Wavelength=570nm, Height=0.9mm, Lead Free="Lead Free", Length=1.6mm, Lens Style=Rectangular,Clear,Diffused,Colorless, Lens Transparency=Clear, Luminous Intensity=16mcd, Manufacturer Part Number 1=SML-310MTT86, Mount="Surface Mount", Number of LEDs=1, Number of Pins=2, Packaging="Tape and Reel", Radiation Hardening=No, Test Current=20mA, Viewing Angle=140°, Wavelength=570nm, Width=0.8mm
FB1: "120 Ohms @ 100 MHz 1 Power Line Ferrite Bead 0402 (1005 Metric) 2A 55mOhm", Current Rating (Max)=2A, DC Resistance (DCR) (Max)=55mOhm, Impedance @ Frequency="120 Ohms @ 100 MHz", MP=BLM15PX121SZ1D
J1 J2: "SOLDER PADS"
L1: library part SRN3012BTA-330M, "10uH", Manufacturer_Name=Bourns, Datasheet Link=https://www.bourns.com/docs/Product-Datasheets/SRN3012BTA.pdf, Geometry.Height=1.2mm, Manufacturer_Part_Number=SRN3012BTA-100M, Mouser Part Number=SRN3012BTA-100M, Mouser Price/Stock=https://www.mouser.co.uk/ProductDetail/Bourns/SRN3012BTA-330M?qs=Imq1NPwxi74rPoSZ4PPaRw%3D%3D
L2: "2.2 ÂµH Shielded Drum Core, Wirewound Inductor 1.5 A 72mOhm Max Nonstandard", Package="Nonstandard Taiyo Yuden", Availability="In Stock", Check_prices=https://www.snapeda.com/parts/NR3015T2R2M/Taiyo+Yuden/view-part/?ref=eda, MF="Taiyo Yuden", MP=NR3015T2R2M, Price=None, Purchase-URL=https://pricing.snapeda.com/search/part/NR3015T2R2M/?ref=eda, SnapEDA_Link=https://www.snapeda.com/parts/NR3015T2R2M/Taiyo+Yuden/view-part/?ref=snap
R1 R11: "RES 4K7 0402", MP=RC0402JR-074K7L
R2 R3 R4 R5 R6 R7 R8 R9 R10: "RES 0R 0402", MP=RC0402JR-070RL
R12: library part CMP-00299-1_1, "RES SMD 511K OHM 1% 1/16W 0402", Case Code (Imperial)=0402, Case Code (Metric)=1005, Manufacturer=Yageo, Manufacturer Part Number=RC0402FR-07511KL, Max Operating Temperature=155°C, Max Power Dissipation=63mW, Min Operating Temperature=-55°C, Package Quantity=1, Power Rating=62.5mW, Temperature Coefficient=100ppm/°C, Tolerance=1%, Voltage Rating=50V, Case/Package=0402, Composition="Thick Film", Depth=0.5mm, Features="Moisture Resistant", Height=0.016inch, Lead Free="Lead Free", Length=1mm, Manufacturer 1=Yageo, Manufacturer Part Number 1=RC0402FR-07511KL, Military Standard=Not, Number of Terminations=2, Packaging="Tape and Reel", Resistance=511K, Termination=SMD/SMT, Voltage Rating (DC)=50V, Width=0.02inch, Working Voltage=50V
R13: library part CMP-00299-1_1, "RES SMD 49.9R OHM 1% 1/16W 0402", Case Code (Imperial)=0402, Case Code (Metric)=1005, Manufacturer=Yageo, Manufacturer Part Number=RC0402FR-0749R9L, Max Operating Temperature=155°C, Max Power Dissipation=63mW, Min Operating Temperature=-55°C, Package Quantity=1, Power Rating=62.5mW, Temperature Coefficient=100ppm/°C, Tolerance=1%, Voltage Rating=50V, Case/Package=0402, Composition="Thick Film", Depth=0.5mm, Features="Moisture Resistant", Height=0.016inch, Lead Free="Lead Free", Length=1mm, Manufacturer 1=Yageo, Manufacturer Part Number 1=RC0402FR-0749R9L, Military Standard=Not, Number of Terminations=2, Packaging="Tape and Reel", Resistance=49.9R, Termination=SMD/SMT, Voltage Rating (DC)=50V, Width=0.02inch, Working Voltage=50V
R14: library part CMP-00299-1_1, "RES SMD 105K OHM 1% 1/16W 0402", Case Code (Imperial)=0402, Case Code (Metric)=1005, Manufacturer=Yageo, Manufacturer Part Number=RC0402FR-07105KL, Max Operating Temperature=155°C, Max Power Dissipation=63mW, Min Operating Temperature=-55°C, Package Quantity=1, Power Rating=62.5mW, Temperature Coefficient=100ppm/°C, Tolerance=1%, Voltage Rating=50V, Case/Package=0402, Composition="Thick Film", Depth=0.5mm, Features="Moisture Resistant", Height=0.016inch, Lead Free="Lead Free", Length=1mm, Manufacturer 1=Yageo, Manufacturer Part Number 1=RC0402FR-07105KL, Military Standard=Not, Number of Terminations=2, Packaging="Tape and Reel", Resistance=105K, Termination=SMD/SMT, Voltage Rating (DC)=50V, Width=0.02inch, Working Voltage=50V
R15: library part CMP-00299-1_1, "RES SMD 100K OHM 1% 1/16W 0402", Case Code (Imperial)=0402, Case Code (Metric)=1005, Manufacturer=Yageo, Manufacturer Part Number=RC0402FR-0749R9L, Max Operating Temperature=155°C, Max Power Dissipation=63mW, Min Operating Temperature=-55°C, Package Quantity=1, Power Rating=62.5mW, Resistance=49.9R, Temperature Coefficient=100ppm/°C, Tolerance=1%, Voltage Rating=50V, Case/Package=0402, Composition="Thick Film", Depth=0.5mm, Features="Moisture Resistant", Height=0.016inch, Lead Free="Lead Free", Length=1mm, Manufacturer 1=Yageo, Manufacturer Part Number 1=RC0402FR-0749R9L, Military Standard=Not, Number of Terminations=2, Packaging="Tape and Reel", Termination=SMD/SMT, Voltage Rating (DC)=50V, Width=0.02inch, Working Voltage=50V
R16: library part CMP-00299-1_1, "RES SMD 13.3K OHM 1% 1/16W 0402", Case Code (Imperial)=0402, Case Code (Metric)=1005, Manufacturer=Yageo, Manufacturer Part Number=RC0402FR-0749R9L, Max Operating Temperature=155°C, Max Power Dissipation=63mW, Min Operating Temperature=-55°C, Package Quantity=1, Power Rating=62.5mW, Resistance=49.9R, Temperature Coefficient=100ppm/°C, Tolerance=1%, Voltage Rating=50V, Case/Package=0402, Composition="Thick Film", Depth=0.5mm, Features="Moisture Resistant", Height=0.016inch, Lead Free="Lead Free", Length=1mm, Manufacturer 1=Yageo, Manufacturer Part Number 1=RC0402FR-0749R9L, Military Standard=Not, Number of Terminations=2, Packaging="Tape and Reel", Termination=SMD/SMT, Voltage Rating (DC)=50V, Width=0.02inch, Working Voltage=50V
R17 R39: "RES 10K 0402", MP=RC0402FR-0710KL
R18 R19 R20 R21 R22 R23 R24 R25 R26 R30 R31: "RES 0402", MP="add later"
R37: "RES 100K 0402", MP=RC0402FR-07100KL
R38: "RES 13K3 0402", MP=RC0402FR-0713K3L
U1: "High-performance and DSP with DP-FPU, Arm Cortex-M7 + Cortex-M4 MCU with 2MBytes of Flash memory, 1MB RAM, 480 MHz CPU, Art Accelerator, L1 cache, external memory interface, large set of peripherals, SMPS, MIPI-DSI", Manufacturer_Name=STMicroelectronics, Copyright="Copyright (C) 2026 Ultra Librarian. All rights reserved.", Manufacturer_Part_Number=STM32H747AII6, RefDes=RefDes, Type=Type
U2: "4.5-V to 28-V Input, 3-A Output, EMI Friendly Synchronous Step-Down Converter", Package="SOT-23-THN-6 Texas Instruments", Availability="In Stock", Check_prices=https://www.snapeda.com/parts/TPS54302DDCR/Texas+Instruments/view-part/?ref=eda, MF="Texas Instruments", MP=TPS54302DDCR, Price=None, Purchase-URL=https://pricing.snapeda.com/search?q=TPS54302DDCR&ref=eda, SnapEDA_Link=https://www.snapeda.com/parts/TPS54302DDCR/Texas+Instruments/view-part/?ref=snap
U3: "LDO IC 1 Output 2A 6-DFN _3x3_", Package="DFN-6 STMicroelectronics", Availability=Unavailable, MF=STMicroelectronics, MP=LD39200PUR, Price=None, SnapEDA_Link=https://www.snapeda.com/parts/LD39200PUR/STMicroelectronics/view-part/882017/?ref=snap
U4: "Accelerometer, Gyroscope, 6 Axis Sensor Output", Package=None, Availability=Unavailable, MP=ICM-42688-P, Price=None
U5 U6: "No Description Available", Mfr_Name="Texas Instruments", RefDes=RefDes, Type=Type
U7: "3V-17V 1A Step-Down Converters with DCS-Controlâ„¢", Package="VSSOP-8 Texas Instruments", Check_prices=https://www.snapeda.com/parts/TPS62160DGKT/Texas+Instruments/view-part/?ref=eda, MF="Texas Instruments", MP=TPS62160DGKT, SnapEDA_Link=https://www.snapeda.com/parts/TPS62160DGKT/Texas+Instruments/view-part/?ref=snap
Y1: "Crystal 24 MHz ±10ppm 12pF 50 Ohms 4-SMD, No Lead", ESR (Equivalent Series Resistance)="50 Ohms", Frequency="24 MHz", Frequency Stability=±10ppm, Load Capacitance=12pF, Operating Temperature="-30°C ~ 85°C", Frequency Tolerance=±10ppm, MP=ECS-240-12-37B-CKY-TR, Size / Dimension="2.00mm x 1.60mm"

## Free pads (board coordinates)
  round 100 / inner round 0 / far side round 100 hole 86.61: 0(79.13,78.72) 0(79.13,708.64) 0(1102.75,708.64) 0(1102.75,78.72)
  round 30 smd paste+0 mask+0: 1(227,718) 1(228,762) 1(290,762) 1(338.5,778)

## Via types
v1: diameter 19.68, hole 11.81, Top Layer to Bottom Layer, tented both sides, 223 vias
v2: diameter 10, hole 5.91, Top Layer to Bottom Layer, tented both sides, 99 vias

## Nets (pads, with @x,y where several pads share a name; then routed paths per layer and width w, separated by ;. In a path a pad name is that pad's centre, name@x,y a point inside that pad or via, vN(x,y) a via of type N, cw(c..) or ccw(c..) an arc to the next point about the centre after c; other vN are vias at no path point)
1V8: C7.2 C23.2 C24.2 C39.2@263.28,642 C40.2@496,646.72 L2.2 R37.2 R38.2 U1.A3 U1.B13 U1.N10 U7.6 | length 2013.6
  Layer 3 w8: v2(206,331) 193.96,343 178,343 161,326 141,326 132,335 132,529 158,555 158,590 187,619 v2(230,619) 230.38,618.62 235.97,618.62 241.62,612.97 241.62,606.38 v2(242,606)
  Layer 4 w8: v2(230,619) 244,633 390.49,633 435,588.49 435,375 v2(393,333)
  Bottom Layer w4: C24.2@177,300.72 194.72,300.72 207,313 207,330 v2(206,331) U1.A3@205.97,355.23 ; v2(393,333) 403.26,343.26 415.54,343.26 C7.2@460.28,388 434,388 420.94,374.94 U1.B13@402.8,374.94
  Bottom Layer w5: U1.N10@343.74,591.48 353,600.74 353,614.57 C23.2@380,641.57 ; C40.2@496,646.72 524.72,646.72 536,658 631,658 ; U7.6@677.35,712.2 677.15,712 642,712 631,701 631,658 ; R37.2@806,594.32 804.03,594.32 792.35,606 727,606 715,594 700.31,594 R38.2@700,594.32 699.68,594 684,594 670,608 670,643 655,658 631,658
  Bottom Layer w6: C39.2@263.28,642 264,642 285,663 285,736 296,747 347,747 359,735 359,662.57 C23.2@380,641.57
12V: C29.1 C30.1 J1.1 R12.1 U2.3 | length 217.4
  Bottom Layer w4: R12.1@999,225.68 1092.68,225.68 1125,258 1125,336
  other v1: 866,253 888,262 905,280 866,281 1086,344 1112,344 1138,344 1163,344 1086,370 1112,370 1138,370 1163,370 1137,395 1085,396 1111,396 1162,396
+5V_SYS: C31.1 C32.1 C34.1 C35.1 C38.2@911,726.72 L1.2 pad.1@338.5,778 R13.1 R17.2 U3.6 U7.2 U7.3 | length 979
  Top Layer w15: pad.1@338.5,778 341.37,780.87 351.98,780.87 352.11,781 513,781 536,758 v1(894,758) v1(921,758)
  Layer 2 w15: v1(894,758) v1(921,758) 983.95,695.05 1004.95,695.05 1060,640 1060,496 v1(1041,477)
  other v1: 957,429 983,430 1006,442 1023,460
C_Main_SWCLK: P1.20 U1.A11 | length 628.8
  Top Layer w4: P1.20@699.09,317.68 701.26,319.84 726,319.84 v1(728.16,322)
  Layer 2 w4: v2(364,342) 377,342 380,345 588.73,345 588.83,345.1 590.1,345.1 634,389 634,461 648.64,475.64 675.36,475.64 688,463 688,362.16 v1(728.16,322)
  Bottom Layer w4: U1.A11@363.43,355.26 363.71,354.97 363.71,342.29 v2(364,342)
C_Main_SWDIO: P1.18 U1.B11 | length 737.6
  Top Layer w4: P1.18@699.09,297.99 727.01,297.99 745,280 v1(745,277)
  Layer 2 w4: v2(354,365) 365,354 585,354 625,394 625,469 642,486 684,486 699,471 699,377 745,331 v1(745,277)
  Bottom Layer w4: v2(354,365) 354,365.26 363.43,374.68 U1.B11@363.43,374.94
C_Roll_TIM4_CH1: P2.24 U1.J10 | length 294.1
  Top Layer w4: v2(333.6,502.6) 353.2,483 414,483 437,460 444,453 444,376 462.8,357.2 P2.24@508,357.2
  Bottom Layer w4: v2(333.6,502.6) U1.J10@343.74,512.74
C_Roll_TIM4_CH2: P2.26 U1.J9 | length 286.2
  Top Layer w4: v2(332.24,521.69) 361.93,492 418,492 437,473 454,456 454,391 468.11,376.89 P2.26@508,376.89
  Bottom Layer w4: U1.J9@324.06,512.74 324.06,513.12 332.24,521.31 v2(332.24,521.69)
C_Roll_TIM4_CH3: P2.28 U1.H9 | length 271.5
  Top Layer w4: v1(474,415) 474,403 480.42,396.58 P2.28@508,396.58
  Layer 3 w4: v2(333,483.48) 364.52,515 398,515 474,439 v1(474,415)
  Bottom Layer w4: U1.H9@324.06,493.06 324.06,492.74 333,483.8 v2(333,483.48)
C_Yaw_TIM1_CH1: P1.24 U1.N6 | length 807
  Top Layer w4: P1.24@699.09,357.05 725.05,357.05 731,363 v1(731,381)
  Layer 3 w4: v2(328,617) 382,671 658,671 696,633 696,494.54 713,477.54 713,386 719,380 730,380 v1(731,381)
  Bottom Layer w4: U1.N6@265,591.48 290.52,617 v2(328,617)
C_Yaw_TIM1_CH2: P1.26 U1.N7 | length 756.4
  Top Layer w4: v1(668,379) 671,376 698.36,376 P1.26@699.09,376.73
  Layer 3 w4: v2(314.85,604) 332.5,604 390.5,662 645,662 687,620 687,488 700,475 700,385 694,379 v1(668,379)
  Bottom Layer w4: U1.N7@284.68,591.48 297.2,604 v2(314.85,604)
C_Yaw_TIM1_CH3: P1.28 U1.H8 | length 729
  Top Layer w4: v1(668,404) 676,396 698.68,396 P1.28@699.09,396.42
  Layer 3 w4: v2(314.82,502.9) 314.66,503.06 314.66,522.66 349,557 349,605 397,653 588,653 621,620 621,414 632,403 667,403 v1(668,404)
  Bottom Layer w4: U1.H8@304.37,493.06 304.67,493.06 314.51,502.9 v2(314.82,502.9)
CAM_TRIGGER: P1.41 P2.41 | length 269.4
  Top Layer w4: v1(581,530) 584,530 590,524 613.36,524 P2.41@613.91,524.54 ; v1(758,530) 763.61,524.39 P1.41@805,524.39
  Layer 2 w4: v1(581,530) 701,530 710,539 747.91,539 756.91,530 v1(758,530)
CAN_H: P1.39 P2.39 | length 283.6
  Top Layer w4: v1(581,505) 581.08,504.92 613.83,504.92 P2.39@613.91,504.84 ; v1(770,505) 770.16,504.84 804.84,504.84 P1.39@805,504.68
  Layer 1 w4: v1(581,505) 691,505 723,473 738,473 v1(770,505)
CAN_L: P1.37 P2.37 | length 290.9
  Top Layer w4: v1(581,478) 583,478 590.16,485.16 P2.37@613.91,485.16 ; v1(772,477) 780,485 P1.37@805,485
  Layer 1 w4: v1(581,478) 599,496 687.27,496 721.27,462 757,462 v1(772,477)
ETHE1_RX_N: P1.9 P2.9 | length 687.9
  Top Layer w4: P2.9@613.91,209.57 602.88,209.57 597.54,204.23 577.27,204.23 556,182.95 556,75.27 576.64,54.64 583.64,47.64 836.36,47.64 864,75.27 864,187.73 858.36,193.36 850.3,201.43 847.66,204.07 821.37,204.07 816.02,209.41 P1.9@805,209.41
ETHE1_RX_P: P1.7 P2.7 | length 627.5
  Top Layer w4: P2.7@613.91,189.88 602.88,189.88 597.54,195.23 581,195.23 567.17,181.4 566,180.23 566,165.8 ccw(c582.71,163.71) 566,161.63 566,78 567.17,76.83 587.36,56.64 832.64,56.64 855,79 855,184 852,187 843.93,195.07 821.37,195.07 816.02,189.72 P1.7@805,189.72
ETHE1_TX_N: P1.3 P2.3 | length 476.2
  Top Layer w4: P2.3@613.91,150.51 602.88,150.51 597.54,145.17 587.27,145.17 576,133.9 576,82.27 587.64,70.64 592.64,65.64 827.73,65.64 845,82.91 845,132.05 832.04,145.01 821.37,145.01 816.02,150.35 P1.3@805,150.35
ETHE1_TX_P: P1.1 P2.1 | length 416.5
  Top Layer w4: P2.1@613.91,130.83 602.88,130.83 597.54,136.17 591,136.17 585,130.17 585,86 596.36,74.64 824,74.64 836,86.64 836,128.33 828.31,136.01 821.37,136.01 816.02,130.67 P1.1@805,130.67
ETHE2_RX_N: P1.25 P2.25 | length 210.6
  Top Layer w4: P2.25@613.91,367.05 624.93,367.05 629.98,362 636.83,362 644,369.17 v1(644,370) ; v1(775,369.37) 775,368.23 782.07,361.16 789.56,361.16 790.07,361.67 790.07,362.98 793.98,366.89 P1.25@805,366.89
  Layer 1 w4: v1(644,370) 646.19,370 654.19,362 765,362 772.37,369.37 v1(775,369.37)
ETHE2_RX_P: P1.23 P2.23 | length 209.4
  Top Layer w4: P2.23@613.91,347.36 624.93,347.36 630.57,353 636.83,353 644,345.83 v1(644,345) ; v1(775,344.68) 775,345.09 782.07,352.16 789.02,352.16 793.98,347.2 P1.23@805,347.2
  Layer 1 w4: v1(644,345) 646.19,345 654.19,353 765,353 773.32,344.68 v1(775,344.68)
ETHE2_TX_N: P1.19 P2.19 | length 210.2
  Top Layer w4: P2.19@613.91,307.99 623.6,307.99 629.1,302.5 636.83,302.5 643,308.67 v1(643,311) ; v1(774,311) 774.07,311 782.07,303 789.14,303 793.98,307.83 P1.19@805,307.83
  Layer 1 w4: v1(643,311) 647,311 655,303 763.81,303 771.81,311 v1(774,311)
ETHE2_TX_P: P1.17 P2.17 | length 211.5
  Top Layer w4: P2.17@613.91,288.31 624.93,288.31 628.83,292.21 628.83,293.24 629.1,293.5 636.83,293.5 643,287.33 v1(643,285) ; v1(774,286) 774.07,286 782.07,294 788.13,294 793.98,288.15 P1.17@805,288.15
  Layer 1 w4: v1(643,285) 646,285 655,294 763.81,294 771.81,286 v1(774,286)
GND: C1.1 C2.1 C3.1 C4.1 C5.1 C6.1 C7.1 C8.1 C9.1 C10.1 C11.1 C12.1 C13.2 C14.1 C15.1 C16.1 C17.1 C18.1 C19.1 C20.1 C21.1 C22.1 C23.1 C24.1 C25.1 C26.1 C27.2 C29.2 C30.2 C31.2 C32.2 C34.2 C35.2 C36.2 C37.2 C38.1@911,691.28 C38.2@893,720.5 C39.1@298.72,642 C39.2@971,738.43 C40.1@496,611.28 C40.2@865.72,226 C41.2 C44.2 C45.2 C46.2 C49.2 D1.1 D2.1 J2.1 P1.5 P1.22 P1.30 P1.35 P1.36 P1.42 P1.43 P1.48 P2.5 P2.18 P2.30 P2.35 P2.40 P2.43 P2.48 pad.1@290,762 R1.1 R14.2 R16.2 R39.1 U1.A1 U1.A7 U1.A12 U1.B3 U1.B4 U1.B9 U1.C12 U1.D1 U1.E13 U1.F1 U1.F2 U1.F3 U1.G12 U1.G13 U1.H2 U1.H11 U1.J11 U1.K11 U1.L1 U1.L13 U1.M6 U1.M9 U1.N1 U2.1 U3.3 U3.7 U4.2 U4.3 U4.6 U4.7 U4.10 U4.11 U5.13 U5.17 U6.13 U6.17 U7.1 U7.4 Y1.2 Y1.4 | length 824.3
  Top Layer w4: C27.2@35,499.72 56.01,499.72 80.33,475.39 Y1.4@80.33,473.43 ; C13.2@35,576.72 58.72,553 97.21,553 121.67,528.54 Y1.2@121.67,526.57 ; D1.1@273,711.2 273,745 pad.1@290,762 ; v1(583,164) 586.39,164 592.59,170.2 P2.5@613.91,170.2 ; v1(736,135) 771.04,170.04 P1.5@805,170.04
  Bottom Layer w4: v2(148,403) 155.26,403 U1.D1@166.57,414.32 ; v2(148,437) 148.94,437 165.63,453.69 U1.F2@186.26,453.69 v2(196.1,443.84) U1.F3@205.94,453.69 ; U1.A1@166.57,355.26 166.57,342.43 174.71,334.29 179.71,334.29 v2(189,325) ; U1.H2@186.26,493.06 186.26,493.37 195.28,502.38 v2(195.28,502.69) ; v2(196,365) U1.B3@205.94,374.94 ; v2(215.68,365) U1.B4@225.63,374.94 ; U1.M6@265,571.8 v2(274,562.8) ; U1.A7@284.68,355.26 297,342.94 v2(297,331) ; U1.B9@324.06,374.94 v2(333,366) ; U1.M9@324.06,571.8 v2(332.85,563) ; U1.H11@363.43,493.06 v2(373,502.63) ; v2(373.27,404.47) U1.C12@383.11,394.63 ; v2(373.74,464) U1.G12@383.11,473.37 ; v2(377,330.03) 377,331.65 383.11,337.76 U1.A12@383.11,355.26 ; U1.E13@402.8,434 v2(418,434) ; U1.G13@402.8,473.37 404.42,473.37 410.64,467.15 412.85,467.15 v2(414,466)
  Bottom Layer w6: C23.1@380,677 401,656 ; v2(389,612) 390,612 401,623 401,656 ; C10.1@421,677 421,676 401,656
  Bottom Layer w8: C19.1@257,43.28 274.41,43.28 280.69,37 v1(284,37)
  other v1: 826,20 855,20 944,20 970,20 996,20 1022,20 136,22 159,22 182,22 166,45 365,106 736,110 1026,124 1043,143 21,146 475,149 1064,157 43,158 1137,160 1088,165 1113,166 21,170 475,174 456,191 21,193 173,235 1024,253 1057,253 1091,255 1073,271 1008,272 1041,272 254,273 354,292 670,335 846,408 546,421 846,432 1086,435 1111,435 1136,435 1162,435 546,446 846,457 1086,460 1111,460 1136,460 1162,460 546,471 846,481 1086,485 1111,485 1136,485 1161,485 546,496 846,506 738,563 1086,580 1110,580 1133,580 1157,580 737,587 1086,604 1110,604 1133,604 1156,604 25,619 47,630 25,642 1023,716 305,726 336,726 1023,741 1023,765 1047,765
  other v2: 297,315 393,503 417,512 417,529 372,606
I2C1_SCL: P1.51 U1.E5 | length 927.8
  Top Layer w4: P1.51@805,622.81 805.19,623 824,623 836,635 v1(836,636)
  Layer 1 w4: v2(235.4,443.92) 219.5,459.81 219.5,636.5 271,688 815,688 836,667 v1(836,636)
  Bottom Layer w4: v2(235.4,443.92) U1.E5@245.31,434
I2C1_SDA: P1.49 U1.C5 | length 1047.6
  Top Layer w4: P1.49@805,603.13 833.13,603.13 841,611 v1(842,611)
  Layer 1 w4: v2(236,403.94) 236,426 210,452 210,630 210,648 260,698 821,698 855,664 855,622 844,611 v1(842,611)
  Bottom Layer w4: v2(236,403.94) U1.C5@245.31,394.63
I2C2_SCL: P1.47 U1.F5 | length 857.7
  Top Layer w4: v1(773.93,586.66) 776.59,584 804.44,584 P1.47@805,583.44
  Layer 2 w4: v2(255.5,463.53) 255.76,463.53 285,492.77 285,671 313,699 737,699 773.93,662.07 v1(773.93,586.66)
  Bottom Layer w4: U1.F5@245.31,453.69 245.49,453.69 255.33,463.53 v2(255.5,463.53)